# EAGLE board Green 1.6mm 40x100mm HASL 100%etest 5pcs (EAGLE 6.5.0)
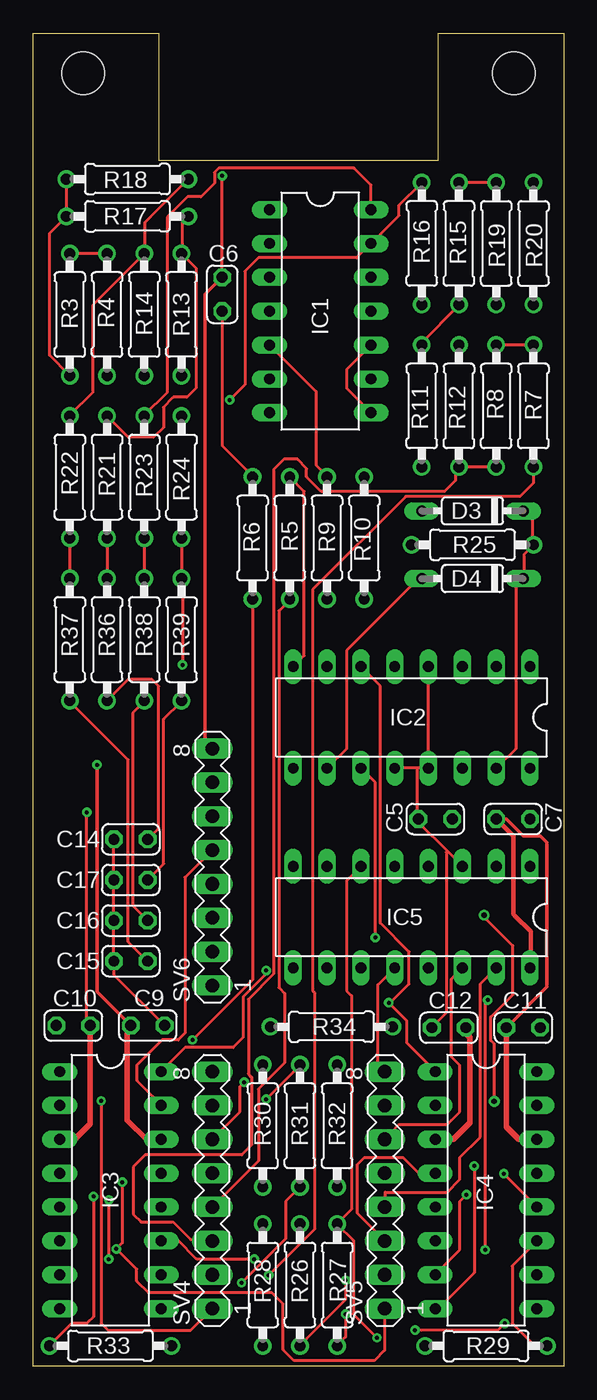
[diagram p0: board, top side]
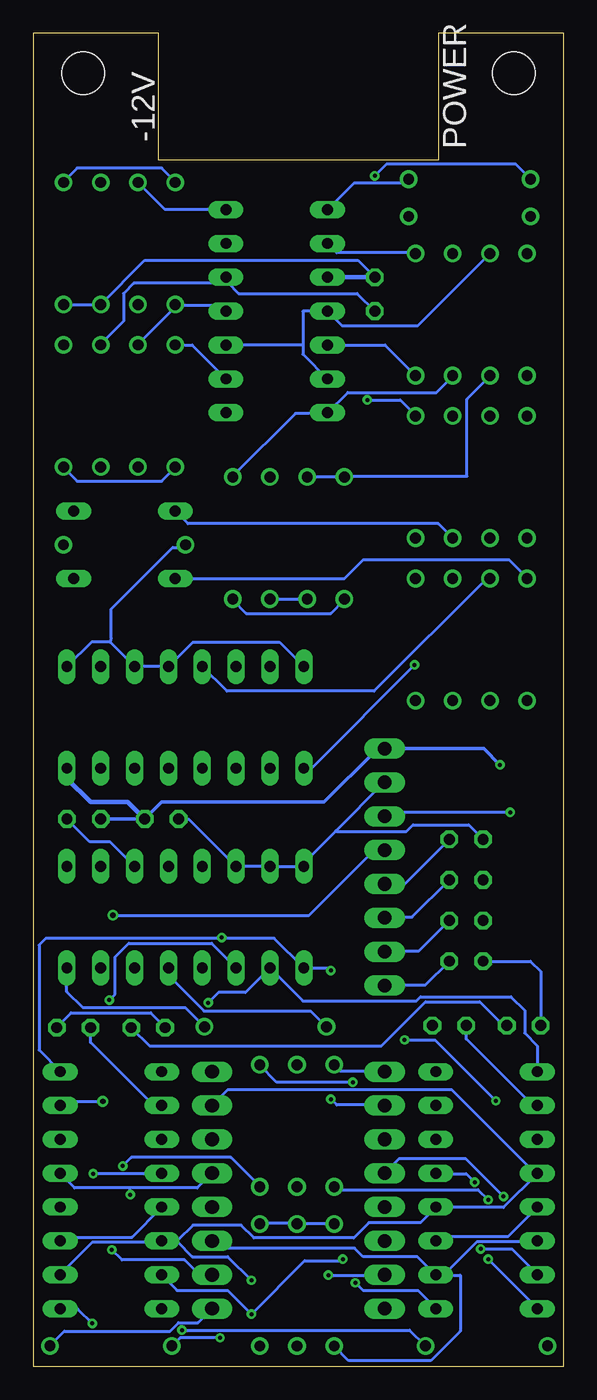
[diagram p1: board, bottom side, seen from below]

Size 39.8 x 100 mm. Coordinates in mm from the lower left corner, seen from the top.
Outline: 0,100 9.4,100 9.4,90.5 30.4,90.5 30.4,100 39.8,100 39.8,0 0,0 0,100
Copper layers (1*16): Top 0.035mm / dielectric 1.5mm / Bottom 0.035mm
Design rules "default": minimum track width 10mil, minimum drill 0.6mm, track to track 8mil, track to pad 8mil, pad to pad 8mil, via to via 8mil, smd to smd 8mil, copper to edge 40mil, drill to drill 8mil, minimum pad ring 10mil, minimum via ring 8mil, stop-mask expansion 4mil, vias tented up to drill 0mil, thermal gap 10mil
Holes 3.2 mm at 3.75,97 36.05,97

## Footprints (pad centres in the part's own frame; a part is rotated, then mirrored left to right if it is on the bottom)
C025-024X044 = drill 0.813 octagon: 1 -1.27,0; 2 1.27,0
DO35-7 = drill 0.813 pad 1.27 long: A 3.81,0; C -3.81,0
DIL14 = drill 0.813 long: 1 -7.62,-3.81; 2 -5.08,-3.81; 3 -2.54,-3.81; 4 0,-3.81; 5 2.54,-3.81; 6 5.08,-3.81; 7 7.62,-3.81; 8 7.62,3.81; 9 5.08,3.81; 10 2.54,3.81; 11 0,3.81; 12 -2.54,3.81; 13 -5.08,3.81; 14 -7.62,3.81
DIL16 = drill 0.813 long: 1 -8.89,-3.81; 2 -6.35,-3.81; 3 -3.81,-3.81; 4 -1.27,-3.81; 5 1.27,-3.81; 6 3.81,-3.81; 7 6.35,-3.81; 8 8.89,-3.81; 9 8.89,3.81; 10 6.35,3.81; 11 3.81,3.81; 12 1.27,3.81; 13 -1.27,3.81; 14 -3.81,3.81; 15 -6.35,3.81; 16 -8.89,3.81
0207/9 = drill 0.813: 1 -4.58,0; 2 4.58,0
MA08-1 = drill 1.016 long: 1 -8.89,0; 2 -6.35,0; 3 -3.81,0; 4 -1.27,0; 5 1.27,0; 6 3.81,0; 7 6.35,0; 8 8.89,0

## Placement (x,y rotation side)
C5  100nF  [C025-024X044]  30.16,41.05 180 top
C6  100nF  [C025-024X044]  14.16,80.42 270 top
C7  100nF  [C025-024X044]  36.01,41.05 0 top
C9  100nF  [C025-024X044]  8.57,25.56 0 top
C10  100nF  [C025-024X044]  2.99,25.56 0 top
C11  100nF  [C025-024X044]  36.77,25.4 0 top
C12  100nF  [C025-024X044]  31.18,25.4 0 top
C14  100nF  [C025-024X044]  7.3,39.53 180 top
C15  100nF  [C025-024X044]  7.3,30.39 180 top
C16  100nF  [C025-024X044]  7.3,33.43 180 top
C17  100nF  [C025-024X044]  7.3,36.48 180 top
D3  1N4148  [DO35-7]  32.96,64.17 180 top
D4  1N4148  [DO35-7]  32.96,59.09 180 top
IC1  LM339  [DIL14]  21.53,79.15 270 top
IC2  4516N  [DIL16]  28.39,48.67 180 top
IC3  DG409DJ  [DIL16]  5.78,13.21 270 top
IC4  DG409DJ  [DIL16]  33.97,13.21 270 top
IC5  4052N  [DIL16]  28.39,33.69 180 top
R3  100k  [0207/9]  2.73,78.9 90 top
R4  22k  [0207/9]  5.53,78.9 90 top
R5  100k  [0207/9]  19.24,62.14 90 top
R6  100k  [0207/9]  16.45,62.14 90 top
R7  100k  [0207/9]  37.53,72.04 90 top
R8  100k  [0207/9]  34.74,72.04 90 top
R9  2.2k  [0207/9]  22.04,62.14 90 top
R10  2.2k  [0207/9]  24.83,62.14 90 top
R11  2.2k  [0207/9]  29.15,72.04 90 top
R12  2.2k  [0207/9]  31.94,72.04 90 top
R13  100k  [0207/9]  11.11,78.9 90 top
R14  100k  [0207/9]  8.32,78.9 90 top
R15  100k  [0207/9]  31.94,84.23 90 top
R16  100k  [0207/9]  29.15,84.23 90 top
R17  22k  [0207/9]  7.05,86.27 180 top
R18  22k  [0207/9]  7.05,89.06 180 top
R19  22k  [0207/9]  34.74,84.23 270 top
R20  22k  [0207/9]  37.53,84.23 270 top
R21  22k  [0207/9]  5.53,66.71 270 top
R22  22k  [0207/9]  2.73,66.71 270 top
R23  22k  [0207/9]  8.32,66.71 270 top
R24  22k  [0207/9]  11.11,66.71 270 top
R25  100k  [0207/9]  32.96,61.63 0 top
R26  100k  [0207/9]  20,6.1 270 top
R27  100k  [0207/9]  22.8,6.1 270 top
R28  100k  [0207/9]  17.21,6.1 270 top
R29  100k  [0207/9]  33.97,1.52 0 top
R30  1k  [0207/9]  17.21,18.03 90 top
R31  1k  [0207/9]  20,18.03 90 top
R32  1k  [0207/9]  22.8,18.03 90 top
R33  1k  [0207/9]  5.78,1.52 180 top
R34  1.8k  [0207/9]  22.37,25.46 0 top
R36  1k  [0207/9]  5.53,54.52 270 top
R37  1k  [0207/9]  2.73,54.52 270 top
R38  1k  [0207/9]  8.32,54.52 270 top
R39  1k  [0207/9]  11.11,54.52 270 top
SV4  [MA08-1]  13.43,13.21 90 top
SV5  [MA08-1]  26.38,13.21 90 top
SV6  [MA08-1]  13.43,37.45 90 top

## Library data of the parts
C5-C7 C9-C12 C14-C17 D3 D4 IC1 IC2 IC5 R3-R34 R36-R39 = Roll Your Own
IC3 IC4 = maxim; MF: INTERSIL; MPN: DG409DJ; OC_FARNELL: 9664084; OC_NEWARK: 06F3963
SV4-SV6 = Roll Your Own; OC_FARNELL: unknown; OC_NEWARK: unknown

## Nets
0V: C5.2 C6.2 C7.2 C9.2 C10.1 C11.2 C12.1 C14.2 C15.2 C16.2 C17.2 IC1.12 IC2.1 IC2.3 IC2.4 IC2.8 IC2.12 IC2.13 IC5.3 IC5.6 IC5.7 IC5.8 R4.1 R5.2 R6.2 R7.2 R8.2 R25.1 R26.1 R27.1 R28.1 R29.1 SV6.7
+12V: C5.1 C6.1 C7.1 C9.1 C11.1 IC1.3 IC2.16 IC3.2 IC3.14 IC4.2 IC4.14 IC5.16 R3.1 R17.2 R18.2 R19.2 R20.2 R34.2 SV6.8
-12V: C10.2 C12.2 IC3.3 IC4.3 SV6.6
FWD-2: R6.1 R10.1 SV4.1
HLD-2: R5.1 R9.1 SV4.4
IO1-2: R30.2 SV4.8
IO2-2: R31.2 SV4.7
IO3-2: R32.2 SV4.6
IO4-2: R33.2 SV4.5
L1-2: IC5.12 SV5.8
L2-2: IC5.14 SV5.6
L3-2: IC5.15 SV5.4
L4-2: IC5.11 SV5.2
N$1: IC2.11 IC3.16 IC4.16 IC5.9
N$2: IC2.6 IC3.1 IC4.1 IC5.10
N$3: IC3.15 IC4.15 SV6.5
N$8: IC4.9 R33.1
N$9: IC4.8 R32.1
N$12: IC3.9 R31.1
N$13: IC3.8 R30.1
N$16: IC1.14 R15.2 R19.1 R23.1
N$19: IC5.13 R34.1
N$20: IC2.5 R21.2 R36.1
N$21: IC1.7 R10.2 R14.1
N$26: IC1.5 R9.2 R13.1
N$27: IC1.9 R11.2 R15.1
N$28: IC1.2 R13.2 R17.1 R21.1
N$29: IC1.4 IC1.6 IC1.8 IC1.10 R3.2 R4.2
N$31: IC1.11 R12.2 R16.1
N$34: D4.A IC2.10 R22.2 R37.1
N$35: IC2.9 R24.2 R39.1
N$39: D3.C D4.C IC2.15 R25.2
N$40: IC1.13 R16.2 R20.1 R24.1
N$42: IC1.1 R14.2 R18.1 R22.1
N$46: D3.A R23.2 R38.1
OI1-2: IC3.4 IC3.12 IC4.6 IC4.10 R26.2 SV5.7
OI2-2: IC3.5 IC3.11 IC4.7 IC4.13 R27.2 SV5.5
OI3-2: IC3.6 IC3.10 IC4.4 IC4.12 R28.2 SV5.3
OI4-2: IC3.7 IC3.13 IC4.5 IC4.11 R29.2 SV5.1
RES-2: R8.1 R12.1 SV4.3
REV-2: R7.1 R11.1 SV4.2
SW1-2: C14.1 R36.2 SV6.4
SW2-2: C15.1 R37.2 SV6.1
SW3-2: C16.1 R38.2 SV6.2
SW4-2: C17.1 R39.2 SV6.3

## Tracks (layer width: path | path; a pad name or v marks a point on that pad's centre or on a via)
0V  (via drill 0.3)
  Top 0.22: R8.2 R7.2 | C6.2 14.16,69.06 16.45,66.77 R6.2 | C9.2 6.03,29.37 C15.2 C16.2 C17.2 C14.2 | v25.78,2.13 24,3.91 24,9.43 22.8,10.64 R27.1 22.86,10.76 23.88,11.78 23.88,27.78 23.5,28.16 23.5,36.42 IC5.6 | 28.83,44.86 IC2.13 IC2.4 | 28.83,44.86 IC2.12 | 31.05,38.64 28.89,40.8 C5.2 28.83,41.12 28.83,44.86 | 31.05,38.64 IC5.3 | C12.1 29.91,25.43 30.99,26.51 30.99,38.58 31.05,38.64 | IC2.8 20.32,53.31 20.32,65.63 19.24,66.71 R5.2
  Bottom 0.22: R4.1 5.53,74.26 7.24,72.55 7.24,66.77 16.45,66.77 R6.2 16.51,66.71 19.24,66.71 R5.2 | C6.2 15.49,80.49 24.39,80.49 25.21,81.31 | IC1.12 25.21,81.31 | R8.2 34.74,76.68 33.02,78.39 33.02,80.49 32.26,81.25 25.78,81.25 25.21,81.31 | IC2.8 21.34,54.33 27.81,54.33 IC2.4 IC2.3 34.04,54.33 | IC2.1 35.43,54.33 34.04,54.33 | R25.1 28.83,61.44 29.34,61.44 33.97,56.8 33.97,54.64 34.04,54.33 | C10.1 1.72,29.62 2.48,30.39 C15.2 | R28.1 17.21,10.7 20,10.7 R26.1 20.07,10.7 22.8,10.7 R27.1 | v25.78,2.13 28.77,2.13 29.34,1.56 R29.1 | 17.08,40.16 19.69,37.56 IC5.8 IC5.7 IC5.6 28.13,41.05 C5.2 | 17.08,40.16 13.46,43.78 SV6.7 | C12.1 29.91,25.43 30.99,26.51 36.96,26.51 38.04,25.43 C11.2 | C7.2 35.56,39.34 34.04,39.34 IC5.3 | C14.2 7.11,40.61 11.3,40.61 11.81,40.1 17.02,40.1 17.08,40.16
+12V  (via drill 0.3)
  Top 0.22: C6.1 v14.16,89.31 | R18.2 R17.2 2.47,86.26 1.21,85 1.21,75.84 R3.1
  Top 0.254: C11.1 38.55,28.45 38.55,39.28 38.04,39.78 36.77,39.78 35.5,41.05 C7.1 | C9.1 4.76,28.1 v4.76,45.12 | C6.1 12.89,80.42 12.89,46.9 13.43,46.36 SV6.8
  Top 0.35: 36.42,17.02 IC4.14 | 8.48,17.02 IC3.14 | C7.1 36.01,39.78 36.01,33.94 36.11,33.84 37.32,32.63 37.32,29.92 IC5.16
  Top 0.406: C11.1 35.5,17.94 36.42,17.02 | 8.48,17.02 7.05,18.45 7.05,25.31 C9.1
  Bottom 0.22: R34.2 28.38,26.89 36.07,26.89 37.28,28.1 IC5.16 | v14.16,89.31 13.27,90.2 3.61,90.2 R18.2 | IC3.2 2.32,19.56 7.3,24.54 C9.1 | IC4.2 30.77,19.56 35.5,24.29 C11.1 | R20.2 R19.2 31.43,82.96 15.43,82.96 C6.1
  Bottom 0.254: C7.1 C5.1 30.16,42.32 17.97,42.32 14.16,46.13 13.63,46.13 SV6.8 5.99,46.34 v4.76,45.12
  Bottom 0.35: C5.1 32.7,42.32 35.5,42.32 37.28,44.1 IC2.16 | C6.1 IC1.3
-12V  (via drill 0.3)
  Top 0.22: C10.2 4,25.81 v4,41.56
  Top 0.35: 3.08,17.02 IC3.3 | 31.53,17.02 IC4.3
  Top 0.406: C10.2 4.26,18.19 3.08,17.02 | C12.2 32.45,24.99 32.77,24.67 32.77,18.26 31.53,17.02
  Bottom 0.22: v4,41.56 12.13,41.56 12.64,41.31 13.38,41.31 SV6.6 | C12.2 31.09,24.04 13.65,24.04 10.35,27.34 6.29,27.34 4.51,25.56 C10.2
FWD-2  (via drill 0.3)
  Top 0.22: v5.08,19.91 5.08,3.21 5.59,2.7 11.81,2.7 13.4,4.29 SV4.1 | v11.94,24.48 16.45,28.99 R6.1
  Bottom 0.22: R6.1 16.45,57.5 17.46,56.48 23.81,56.48 24.83,57.5 R10.1 | v5.08,19.91 9.65,24.48 v11.94,24.48
HLD-2
  Top 0.22: SV4.4 13.46,11.97 16.89,15.4 16.89,20.8 18.86,22.77 18.86,27.97 18.42,28.42 18.42,56.67 19.24,57.5 R5.1
  Bottom 0.22: R5.1 R9.1
IO1-2
  Bottom 0.22: R30.2 17.21,22.58 16.77,22.13 13.46,22.13 SV4.8
IO2-2  (via drill 0.3)
  Top 0.22: v17.46,20.04 20,22.58 R31.2
  Bottom 0.22: v17.46,20.04 17.02,19.59 13.46,19.59 SV4.7
IO3-2  (via drill 0.3)
  Top 0.22: v15.81,21.3 15.49,20.99 15.49,19.08 13.46,17.05 SV4.6
  Bottom 0.22: v15.81,21.3 21.53,21.3 22.8,22.58 R32.2
IO4-2  (via drill 0.3)
  Top 0.22: v4.51,12.73 4.51,3.72 4,3.21 2.86,3.21 1.21,1.56 R33.2
  Bottom 0.22: v4.51,12.73 7.37,15.59 12.32,15.59 13.4,14.51 SV4.5
L1-2
  Top 0.22: IC5.12 25.85,28.61 25.85,22.64 26.35,22.13 SV5.8
L2-2
  Top 0.22: IC5.14 31.37,29.05 31.37,23.21 32.01,22.58 32.01,19.08 31.05,18.13 27.43,18.13 26.42,17.05 SV5.6
L3-2
  Top 0.22: IC5.15 33.53,28.67 33.53,17.18 32.01,15.65 32.01,14 31.05,13.05 26.42,13.05 26.42,11.97 SV5.4
L4-2  (via drill 0.3)
  Top 0.22: v34.1,27.46 33.91,27.27 v33.91,8.73
  Bottom 0.22: IC5.11 26.42,31.72 32.64,31.72 33.66,30.7 33.66,27.91 v34.1,27.46 | v33.91,8.73 33.15,7.97 28.45,7.97 27.37,6.89 26.42,6.89 SV5.2
N$1  (via drill 0.3)
  Top 0.22: v17.46,29.69 17.46,29.43 15.75,27.72 15.75,24.67 14.99,23.91 11.37,23.91 9.59,22.13 IC3.16 | IC2.11 25.66,43.78 v25.66,32.16
  Bottom 0.22: v17.46,29.69 17.65,29.88 IC5.9 21.72,32.1 25.66,32.1 | 25.66,32.1 38.86,32.1 39.37,31.59 39.37,23.72 37.78,22.13 IC4.16 | v25.66,32.16 25.66,32.1
N$2  (via drill 0.3)
  Top 0.22: v26.67,27.27 26.73,27.21 | 26.73,27.21 28,25.94 28,24.29 30.16,22.13 IC4.1 | IC2.6 26.04,51.02 26.04,33.24 28.2,31.08 28.2,28.67 26.73,27.21
  Bottom 0.22: IC3.1 1.97,24.04 2.92,24.99 2.92,26.7 3.94,27.72 10.73,27.72 11.05,27.4 19.56,27.4 IC5.10 23.88,28.04 25.91,28.04 v26.67,27.27
N$3  (via drill 0.4)
  Top 0.22: IC3.15 9.59,19.59 7.75,21.43 7.75,22.58 9.65,24.48 10.86,24.48 11.37,24.99 11.37,36.67 13.4,38.7 SV6.5 | v34.59,19.87 34.59,24.18 34.33,24.44 34.33,26.22 35.98,27.87 35.98,31.55 33.82,33.71 v33.82,33.84
  Bottom 0.22: IC4.15 37.48,19.87 v34.59,19.87 | v33.82,33.84 19.09,33.84 14.27,38.66 13.48,38.66 SV6.5
N$8  (via drill 0.3)
  Top 0.22: v28.64,2.7 34.86,2.7 v35.37,3.21
  Bottom 0.22: v28.64,2.7 11.56,2.7 10.41,1.56 R33.1 | v35.37,3.21 36.45,4.29 37.78,4.29 IC4.9
N$9  (via drill 0.3)
  Top 0.22: v33.09,15.02 33.09,7.02 30.42,4.35 IC4.8
  Bottom 0.22: v33.09,15.02 32.45,15.65 24.96,15.65 22.8,13.49 R32.1
N$12  (via drill 0.3)
  Top 0.22: v15.62,6.26 18.92,9.56 18.92,12.35 20,13.43 R31.1
  Bottom 0.22: v15.62,6.26 15.05,5.68 10.92,5.68 9.59,4.35 IC3.9
N$13  (via drill 0.3)
  Top 0.22: v5.65,12.48 v5.65,8.03
  Bottom 0.22: v5.65,8.03 1.97,4.35 IC3.8 | v5.65,12.48 6.42,13.24 17.02,13.24 17.21,13.43 R30.1
N$16
  Top 0.22: R15.2 R19.1 | IC1.14 25.34,88.61 24.07,89.89 13.91,89.89 13.59,89.57 13.59,88.74 12.57,87.73 11.56,87.73 10.03,86.2 10.03,73.06 8.32,71.34 R23.1
  Bottom 0.22: IC1.14 29.91,86.77 R15.2
N$19
  Bottom 0.22: IC5.13 29.66,29.31 26.99,26.64 18.99,26.64 17.84,25.5 R34.1
N$20
  Top 0.22: R21.2 R36.1
  Bottom 0.22: IC2.5 25.27,50.64 14.23,50.64 5.77,59.1 R36.1 | 5.53,59.15 R36.1 | 5.53,59.09 R36.1
N$21
  Bottom 0.22: R14.1 8.32,74.26 9.53,73.06 16.19,73.06 IC1.7 17.78,71.47 20.13,71.47 24.83,66.77 R10.2
N$26
  Top 0.22: IC1.5 21.21,73.12 21.21,67.6 22.04,66.77 R9.2
  Bottom 0.22: IC1.5 13.4,76.61 R13.1
N$27
  Top 0.22: R11.2 29.15,76.81 31.94,79.6 R15.1
  Bottom 0.22: IC1.9 27.88,76.61 R11.2
N$28
  Top 0.22: R21.1 7.11,69.69 9.02,69.69 9.76,70.43 9.76,71.96 10.5,72.7 11.52,72.7 12.19,73.38 12.19,82.39 R13.2 11.18,83.53 11.18,85.82 R17.1
  Bottom 0.22: IC1.2 17.02,83.53 11.11,83.53 R13.2
N$29
  Top 0.22: IC1.8 23.5,73.38 23.5,74.77 IC1.10 | R3.2 R4.2
  Bottom 0.22: IC1.6 19.56,75.92 19.56,76.61 | 19.56,76.61 19.56,79.15 IC1.4 16.64,78.08 10.92,78.08 R4.2 | 19.56,76.61 IC1.10
N$31
  Bottom 0.22: IC1.11 25.78,79.6 29.15,79.6 R16.1 29.08,79.53 31.94,76.68 R12.2
N$34
  Top 0.22: R22.2 R37.1 | IC2.10 23.5,46.33 23.5,53.69 28.89,59.09 D4.A
  Bottom 0.22: D4.A 16.45,59.09 15.03,60.51 4.11,60.51 2.73,59.13 R37.1 2.73,59.09
N$35  (via drill 0.3)
  Top 0.22: R24.2 R39.1 11.18,59.02 v11.18,52.61
  Bottom 0.22: IC2.9 19.43,44.93 18.86,44.93 v11.18,52.61
N$39
  Top 0.22: IC2.15 36.2,46.33 36.2,58.52 D4.C 36.83,59.15 36.83,60.93 R25.2 37.47,61.69 37.47,63.47 D3.C
N$40  (via drill 0.3)
  Top 0.22: v14.73,72.49 15.88,73.63 15.88,82.14 16.89,83.15 24.26,83.15 IC1.13 27.43,86.33 27.43,87.09 R16.2
  Bottom 0.22: v14.73,72.49 12.26,72.49 11.11,71.34 R24.1 | R20.1 37.53,88.87 36.51,89.89 30.16,89.89 29.15,88.87 R16.2
N$42
  Top 0.22: R22.1 2.73,71.34 4.45,73.06 4.45,79.6 R14.2 8.38,83.53 8.38,85.82 R18.1
  Bottom 0.22: IC1.1 15.75,88.74 12,88.74 11.69,89.06 R18.1
N$46
  Top 0.22: R23.2 R38.1
  Bottom 0.22: D3.A 28.2,63.22 9.4,63.22 R23.2
OI1-2  (via drill 0.3)
  Top 0.22: v23.43,6.45 23.43,4.99 20,1.56 R26.2
  Bottom 0.22: v23.43,6.45 25.21,8.22 27.88,8.22 29.02,9.37 30.16,9.37 IC4.6 | IC4.10 37.78,6.89 35.37,9.3 30.23,9.3 IC4.6 | SV5.7 26.35,19.59 25.21,20.73 8.38,20.73 2.1,14.45 IC3.4 1.97,14.45 4.51,11.91 9.59,11.91 IC3.12 9.65,11.84 10.73,10.76 14.61,10.76 15.75,9.62 23.24,9.62 24.2,10.57 27.81,10.57 28.96,9.43 IC4.6
OI2-2  (via drill 0.3)
  Top 0.22: v23.43,3.91 23.43,2.19 22.8,1.56 R27.2 | v16.57,8.03 12.26,8.03 10.86,9.43 10.61,9.37 9.59,9.37 IC3.11 | v32.51,12.86 32.01,12.35 32.01,8.73 30.16,6.89 IC4.7
  Bottom 0.22: 32.51,13.37 27.5,13.37 26.42,14.45 SV5.5 | 32.51,13.37 36.7,13.37 37.78,14.45 IC4.13 | IC3.5 1.97,11.91 4.13,9.75 9.27,9.75 9.59,9.43 IC3.11 | IC4.7 30.16,6.83 29.02,5.68 25.21,5.68 v23.43,3.91 19.43,7.91 16.7,7.91 v16.57,8.03 | v32.51,12.86 32.51,13.37
OI3-2  (via drill 0.3)
  Top 0.22: IC4.4 30.16,14.51 28.89,14.51 27.75,15.65 24.83,15.65 24.32,15.15 24.32,11.46 26.35,9.43 SV5.3 | v35.31,14.45 37.78,11.97 IC4.12
  Bottom 0.22: v35.31,14.45 30.16,14.45 IC4.4 | R28.2 17.21,1.49 16.13,0.41 9.97,0.41 7.75,2.64 7.75,6.83 9.59,6.83 IC3.10 | IC3.6 1.97,9.37 6.48,9.37 8.96,6.89 IC3.10 | SV5.3 26.35,9.37 25.85,8.86 15.69,8.86 15.05,8.22 10.99,8.22 9.65,6.89 IC3.10
OI4-2  (via drill 0.3)
  Top 0.22: v6.67,13.81 6.67,9.24 v6.22,8.8 7.75,7.27 7.75,6.38 8.64,5.49 17.91,5.49 18.73,4.67 18.73,1.24 19.56,0.41 25.59,0.41 26.35,1.18 26.35,4.29 SV5.1 | R29.2 37.59,1.56 35.94,3.21 35.94,7.53 37.78,9.37 IC4.11
  Bottom 0.22: v6.22,8.8 3.88,8.8 1.97,6.89 IC3.7 | v6.67,13.81 7.3,14.45 9.59,14.45 IC3.13 | IC4.5 30.16,11.91 32.39,9.69 37.53,9.69 37.78,9.43 IC4.11 | SV5.1 26.42,4.29 27.43,3.27 28.89,3.27 29.53,2.64 37.47,2.64 38.55,1.56 R29.2
RES-2
  Top 0.22: R8.1 R12.1 31.88,67.41 31.69,67.22 31.69,66.45 30.86,65.63 21.59,65.63 20.51,66.71 20.51,67.34 19.81,68.04 18.8,68.04 18.04,67.28 18.04,29.43 16.13,27.53 16.13,21.94 16.38,21.69 16.38,16.61 15.62,15.85 8.38,15.85 7.5,14.96 7.5,11.4 8.07,10.83 10.48,10.83 11.75,9.56 12,9.43 13.4,9.43 SV4.3
REV-2  (via drill 0.3)
  Top 0.22: v17.65,6.83 21.08,10.26 21.08,28.04 20.96,28.16 20.96,58.26 27.94,65.25 36.51,65.25 37.53,66.26 R7.1
  Bottom 0.22: R11.1 29.15,67.41 30.16,66.39 36.51,66.39 37.53,67.41 R7.1 | v17.65,6.83 13.46,6.83 SV4.2
SW1-2
  Top 0.22: C14.1 9.4,40.35 9.4,51.02 8.89,51.53 7.11,51.53 R36.2
  Bottom 0.22: C14.1 11.88,36.23 13.4,36.23 SV6.4
SW2-2
  Top 0.22: C15.1 7.11,31.85 7.11,45.5 2.73,49.88 R37.2
  Bottom 0.22: C15.1 10.35,28.61 13.4,28.61 SV6.1
SW3-2
  Top 0.22: C16.1 7.5,34.51 7.5,49.05 8.32,49.88 R38.2
  Bottom 0.22: C16.1 10.86,31.15 13.4,31.15 SV6.2
SW4-2
  Top 0.22: C17.1 9.78,37.69 9.78,48.55 11.11,49.88 R39.2
  Bottom 0.22: C17.1 11.37,33.69 13.4,33.69 SV6.3

## Text on the board
bPlace: -12V | POWER